# EAGLE board Receiver_SMD_MEGA_2560_v0.5 (EAGLE 6.4)
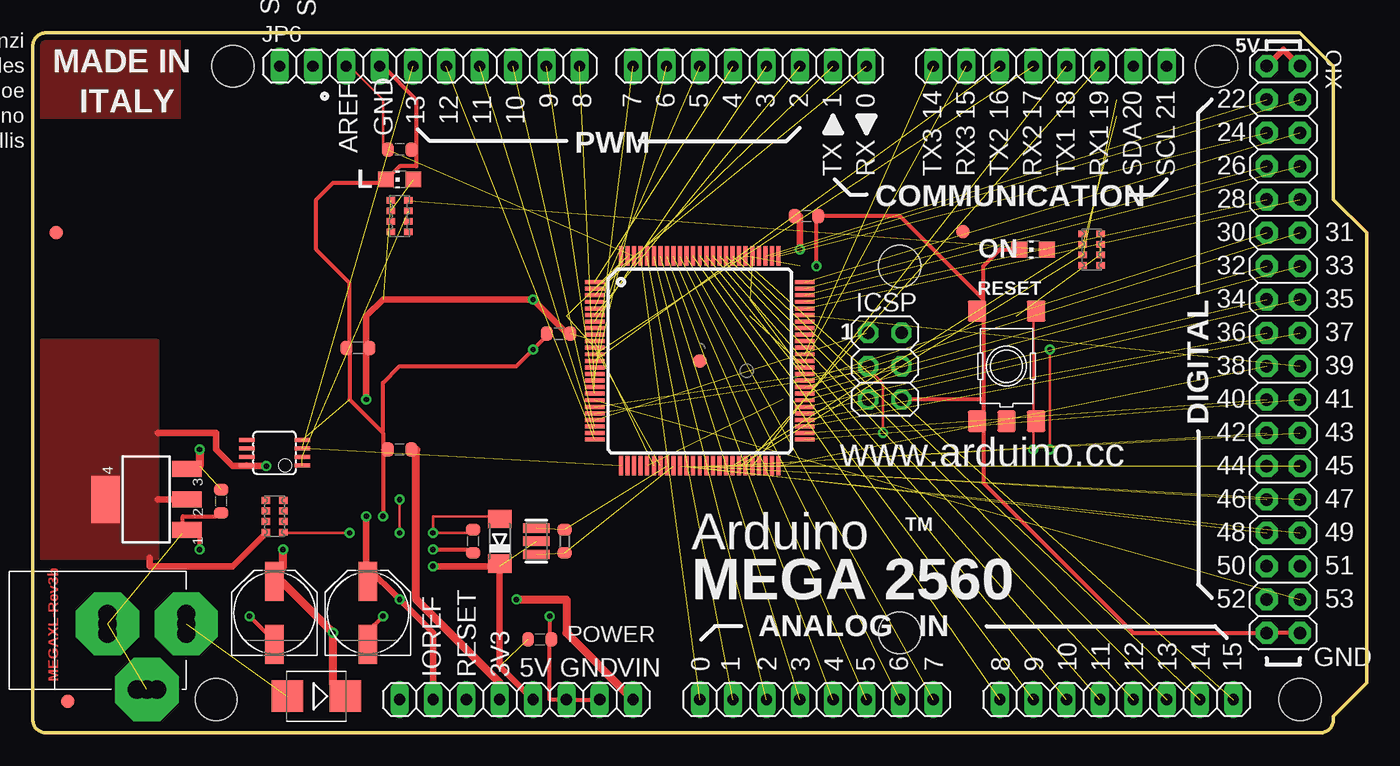
[diagram p0: board, top side]
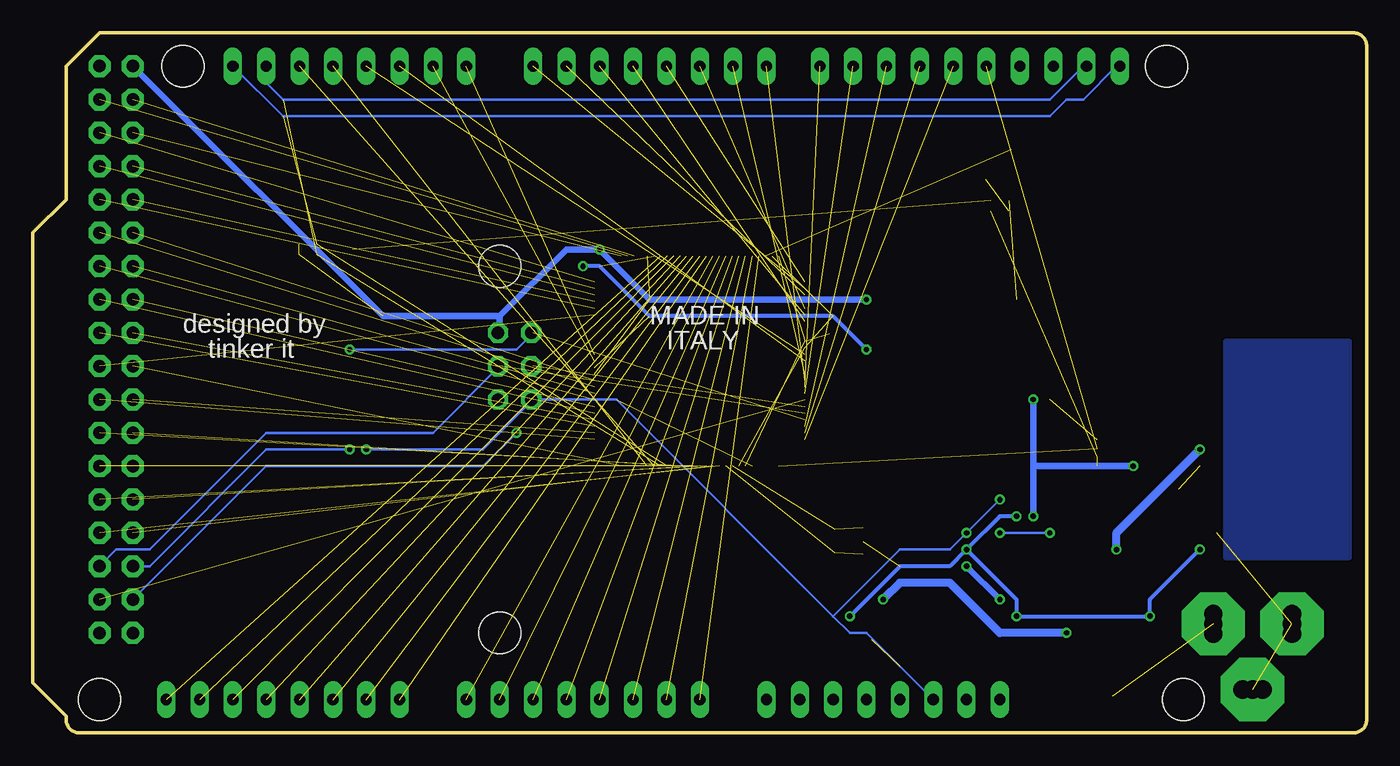
[diagram p1: board, bottom side, seen from below]

Size 101.6 x 53.34 mm. Coordinates in mm from the lower left corner, seen from the top.
Outline: 96.52,53.34 99.06,50.8 99.06,40.64 101.6,38.1 101.6,3.81 99.06,1.27 99.06,1 arc-90 98.06,0 1,0 arc-90 0,1 0,52.34 arc-90 1,53.34 96.52,53.34
Copper layers (1*16): Top 0.0356mm / dielectric 1.5011mm / Bottom 0.0356mm
Design rules "LaenPCBOrder": minimum track width 6mil, minimum drill 13mil, track to track 6mil, track to pad 6mil, pad to pad 6mil, via to via 12mil, smd to smd 6mil, copper to edge 15mil, drill to drill 6mil, minimum pad ring 7mil, minimum via ring 7mil, stop-mask expansion 4mil, vias tented up to drill 0mil, thermal gap 10mil
Net classes: 0 default: width 0.203 mm, drill 0.406 mm, clearance 0.203 mm; 1 power: width 0.61 mm, drill 0.406 mm, clearance 0.203 mm; 2 gnd: width 0.305 mm, drill 0.406 mm, clearance 0.203 mm; 3 power usb: width 0.508 mm, drill 0.406 mm, clearance 0.203 mm
Holes 3.2 mm at 96.52,2.54 15.24,50.8 90.17,50.8 13.97,2.54 66.04,35.56 66.04,7.62

## Footprints (pad centres in the part's own frame; a part is rotated, then mirrored left to right if it is on the bottom)
1X08 = drill 0.85 pad 1.422 long: 1 -8.89,0; 2 -6.35,0; 3 -3.81,0; 4 -1.27,0; 5 1.27,0; 6 3.81,0; 7 6.35,0; 8 8.89,0
C0603-ROUND = smd 0.898 x 1.1: 1 -0.889,0; 2 0.889,0
SMB = smd 2.4 x 2.4: A 2.2,0; C -2.2,0
MINIMELF = smd 1.4 x 1.8: A 1.7,0; C -1.7,0
FIDUCIA-MOUNT = smd 1.016 x 1.016: P$1 0,0
SOT223 = smd 1.219 x 2.235: 1 -2.311,-3.099; 2 0,-3.099; 3 2.311,-3.099 | smd 3.6 x 2.2: 4 0,3.099
TQFP100 = smd 1.5 x 0.3: 1 -8,6; 2 -8,5.5; 3 -8,5; 4 -8,4.5; 5 -8,4; 6 -8,3.5; 7 -8,3; 8 -8,2.5; 9 -8,2; 10 -8,1.5; 11 -8,1; 12 -8,0.5; 13 -8,0; 14 -8,-0.5; 15 -8,-1; 16 -8,-1.5; 17 -8,-2; 18 -8,-2.5; 19 -8,-3; 20 -8,-3.5; 21 -8,-4; 22 -8,-4.5; 23 -8,-5; 24 -8,-5.5; 25 -8,-6; 51 8,-6; 52 8,-5.5; 53 8,-5; 54 8,-4.5; 55 8,-4; 56 8,-3.5; 57 8,-3; 58 8,-2.5; 59 8,-2; 60 8,-1.5; 61 8,-1; 62 8,-0.5; 63 8,0; 64 8,0.5; 65 8,1; 66 8,1.5; 67 8,2; 68 8,2.5; 69 8,3; 70 8,3.5; 71 8,4; 72 8,4.5; 73 8,5; 74 8,5.5; 75 8,6 | smd 0.3 x 1.5: 26 -6,-8; 27 -5.5,-8; 28 -5,-8; 29 -4.5,-8; 30 -4,-8; 31 -3.5,-8; 32 -3,-8; 33 -2.5,-8; 34 -2,-8; 35 -1.5,-8; 36 -1,-8; 37 -0.5,-8; 38 0,-8; 39 0.5,-8; 40 1,-8; 41 1.5,-8; 42 2,-8; 43 2.5,-8; 44 3,-8; 45 3.5,-8; 46 4,-8; 47 4.5,-8; 48 5,-8; 49 5.5,-8; 50 6,-8; 76 6,8; 77 5.5,8; 78 5,8; 79 4.5,8; 80 4,8; 81 3.5,8; 82 3,8; 83 2.5,8; 84 2,8; 85 1.5,8; 86 1,8; 87 0.5,8; 88 0,8; 89 -0.5,8; 90 -1,8; 91 -1.5,8; 92 -2,8; 93 -2.5,8; 94 -3,8; 95 -3.5,8; 96 -4,8; 97 -4.5,8; 98 -5,8; 99 -5.5,8; 100 -6,8
MSOP08 = smd 0.3 x 1.2: 1 -0.976,-2.113; 2 -0.326,-2.113; 3 0.324,-2.113; 4 0.974,-2.113; 5 0.974,2.112; 6 0.324,2.112; 7 -0.326,2.112; 8 -0.976,2.112
2X03 = drill 0.95 pad 1.55 octagon: 1 -2.54,-1.27; 2 -2.54,1.27; 3 0,-1.27; 4 0,1.27; 5 2.54,-1.27; 6 2.54,1.27
1X10 = drill 0.85 pad 1.422 long: 1 -11.43,0; 2 -8.89,0; 3 -6.35,0; 4 -3.81,0; 5 -1.27,0; 6 1.27,0; 7 3.81,0; 8 6.35,0; 9 8.89,0; 10 11.43,0
CHIP-LED0805 = smd 1.2 x 1.2: A 0,-1.05; C 0,1.05
PANASONIC_D = smd 3 x 1.4: + 2.4,0; - -2.4,0
R0603-ROUND = smd 0.898 x 1.1: 1 -0.889,0; 2 0.889,0
TS42 = smd 1.6 x 1.4: 1 -4.2,2.25; 2 4.2,2.25; 3 -4.2,-2.25; 4 4.2,-2.25; 5 -4.2,0
CAT16 = smd 0.5 x 0.65: 1 -1.2,-0.675; 2 -0.4,-0.675; 3 0.4,-0.675; 4 1.2,-0.675; 5 1.2,0.675; 6 0.4,0.675; 7 -0.4,0.675; 8 -1.2,0.675
CAY16 = smd 0.5 x 0.65: 1 -1.2,-0.675; 2 -0.4,-0.675; 3 0.4,-0.675; 4 1.2,-0.675; 5 1.2,0.675; 6 0.4,0.675; 7 -0.4,0.675; 8 -1.2,0.675
POWERSUPPLY_DC-21MM = drill 1.4 pad 4.826 octagon: 1 -5.08,-3.353; 2 -0.076,-6.35; 3 -0.076,-0.356 | drill 1.4: 4 -5.08,-4.115; 5 -5.08,-2.591; 6 -0.838,-0.356; 7 0.686,-0.356; 8 -0.838,-6.35; 9 0.686,-6.35
2X18 = drill 0.95 pad 1.676 octagon: 1 -21.59,-1.27; 2 -21.59,1.27; 3 -19.05,-1.27; 4 -19.05,1.27; 5 -16.51,-1.27; 6 -16.51,1.27; 7 -13.97,-1.27; 8 -13.97,1.27; 9 -11.43,-1.27; 10 -11.43,1.27; 11 -8.89,-1.27; 12 -8.89,1.27; 13 -6.35,-1.27; 14 -6.35,1.27; 15 -3.81,-1.27; 16 -3.81,1.27; 17 -1.27,-1.27; 18 -1.27,1.27; 19 1.27,-1.27; 20 1.27,1.27; 21 3.81,-1.27; 22 3.81,1.27; 23 6.35,-1.27; 24 6.35,1.27; 25 8.89,-1.27; 26 8.89,1.27; 27 11.43,-1.27; 28 11.43,1.27; 29 13.97,-1.27; 30 13.97,1.27; 31 16.51,-1.27; 32 16.51,1.27; 33 19.05,-1.27; 34 19.05,1.27; 35 21.59,-1.27; 36 21.59,1.27
RESONATOR = smd 0.7 x 2: 1 -1,0; 2 0,0; 3 1,0

## Placement (x,y rotation side)
ADCH  8x1F-H8.5  [1X08]  82.55,2.54 0 top
ADCL  8x1F-H8.5  [1X08]  59.69,2.54 0 top
C1  22p  [C0603-ROUND]  33.53,14.61 270 top
C2  100n  [C0603-ROUND]  14.35,17.65 270 top
C3  100n  [C0603-ROUND]  27.94,44.45 0 top
C4  100n  [C0603-ROUND]  38.61,7.11 0 top
C5  100n  [C0603-ROUND]  58.93,39.37 0 top
C6  100n  [C0603-ROUND]  40.05,30.42 180 top
C11  100n  [C0603-ROUND]  24.77,29.34 0 top
C13  1u  [C0603-ROUND]  27.94,21.59 0 top
COMMUNICATION  8x1F-H8.5  [1X08]  77.47,50.8 180 top
D1  M7  [SMB]  21.59,2.79 180 top
D3  CD1206-S01575  [MINIMELF]  35.56,14.61 90 top
FD1  FIDUCIALMOUNT  [FIDUCIA-MOUNT]  70.84,38.19 0 top
FD2  FIDUCIALMOUNT  [FIDUCIA-MOUNT]  2.67,2.41 0 top
FD3  FIDUCIALMOUNT  [FIDUCIA-MOUNT]  1.78,38.1 0 top
FD4  FIDUCIALMOUNT  [FIDUCIA-MOUNT]  50.8,28.35 0 top
IC1  NCP1117ST50T3G  [SOT223]  8.64,17.78 90 top
IC3  ATMEGA2560-16AU  [TQFP100]  50.8,28.35 0 top
IC7  LMV358IDGKR  [MSOP08]  18.41,21.34 90 top
ICSP  3x2M  [2X03]  64.9,27.94 270 top
JP6  10x1F-H8.5  [1X10]  30.23,50.8 0 top
L  YELLOW  [CHIP-LED0805]  27.94,42.16 90 top
ON  GREEN  [CHIP-LED0805]  76.2,36.83 90 top
PC1  47u  [PANASONIC_D]  18.41,9.14 90 top
PC2  47u  [PANASONIC_D]  25.53,9.14 90 top
POWER  8x1F-H8.5  [1X08]  36.83,2.54 0 top
PWML  8x1F-H8.5  [1X08]  54.61,50.8 180 top
R1  1M  [R0603-ROUND]  40.51,14.61 90 top
RESET  TS42031-160R-TR-7260  [TS42]  74.17,27.94 90 top
RN1  10K  [CAT16]  80.64,36.83 270 top
RN3  1k  [CAY16]  27.94,39.37 270 top
RN5  10K  [CAT16]  18.41,16.51 90 top
X1  POWERSUPPLY_DC21MMX  [POWERSUPPLY_DC-21MM]  5.33,8.38 90 top
XIO  18x2F-H8.5  [2X18]  95.25,29.21 270 top
Y1  CSTCE16M0V53-R0 16MHZ  [RESONATOR]  38.35,14.61 270 top

## Library data of the parts
ADCH ADCL C1-C6 C11 C13 COMMUNICATION FD1-FD4 IC3 ICSP JP6 POWER PWML R1 RESET X1 XIO Y1 = SmartPrj
D1 D3 = diode
IC1 IC7 = linear
L ON = led
PC1 PC2 = rcl
RN1 RN3 RN5 = resistor-dil

## Nets
5-GND: RESET.5
+3V3 [power]: C13.2 POWER.4
+5V [power usb]: C4.1 C5.1 C6.1 C11.2 D3.C IC1.2 IC1.4 IC3.10 IC3.31 IC3.61 IC3.80 IC3.100 IC7.8 ICSP.2 PC2.+ POWER.2 POWER.5 RN1.6 RN1.7 RN3.1 RN5.8 XIO.1 XIO.2
ADC0: ADCL.1 IC3.97
ADC1: ADCL.2 IC3.96
ADC2: ADCL.3 IC3.95
ADC3: ADCL.4 IC3.94
ADC4: ADCL.5 IC3.93
ADC5: ADCL.6 IC3.92
ADC6: ADCL.7 IC3.91
ADC7: ADCL.8 IC3.90
ADC8: ADCH.1 IC3.89
ADC9: ADCH.2 IC3.88
ADC10: ADCH.3 IC3.87
ADC11: ADCH.4 IC3.86
ADC12: ADCH.5 IC3.85
ADC13: ADCH.6 IC3.84
ADC14: ADCH.7 IC3.83
ADC15: ADCH.8 IC3.82
AREF: C3.1 IC3.98 JP6.3
GND [gnd]: C1.2 C2.2 C3.2 C4.2 C5.2 C6.2 C11.1 C13.1 IC1.1 IC3.11 IC3.32 IC3.62 IC3.81 IC3.99 IC7.4 ICSP.6 JP6.4 L.C ON.C PC1.- PC2.- POWER.6 POWER.7 RESET.1 RESET.2 X1.1 X1.3 XIO.35 XIO.36 Y1.2
L13: IC7.1 IC7.2 RN3.7
N$2: L.A RN3.2
N$3: ON.A RN3.8
PA0: IC3.78 XIO.3
PA1: IC3.77 XIO.4
PA2: IC3.76 XIO.5
PA3: IC3.75 XIO.6
PA4: IC3.74 XIO.7
PA5: IC3.73 XIO.8
PA6: IC3.72 XIO.9
PA7: IC3.71 XIO.10
PB0: IC3.19 XIO.34
PB1: IC3.20 ICSP.3 XIO.33
PB2: IC3.21 ICSP.4 XIO.32
PB3: IC3.22 ICSP.1 XIO.31
PB4: IC3.23 JP6.8
PB5: IC3.24 JP6.7
PB6: IC3.25 JP6.6
PB7: IC3.26 IC7.3 JP6.5
PC0: IC3.53 XIO.18
PC1: IC3.54 XIO.17
PC2: IC3.55 XIO.16
PC3: IC3.56 XIO.15
PC4: IC3.57 XIO.14
PC5: IC3.58 XIO.13
PC6: IC3.59 XIO.12
PC7: IC3.60 XIO.11
PD7: IC3.50 XIO.19
PE0: IC3.2 PWML.1
PE1: IC3.3 PWML.2
PE3: IC3.5 PWML.6
PE4: IC3.6 PWML.3
PE5: IC3.7 PWML.4
PG0: IC3.51 XIO.22
PG1: IC3.52 XIO.21
PG2: IC3.70 XIO.20
PG5: IC3.1 PWML.5
PH3: IC3.15 PWML.7
PH4: IC3.16 PWML.8
PH5: IC3.17 JP6.10
PH6: IC3.18 JP6.9
PL0: IC3.35 XIO.30
PL1: IC3.36 XIO.29
PL2: IC3.37 XIO.28
PL3: IC3.38 XIO.27
PL4: IC3.39 XIO.26
PL5: IC3.40 XIO.25
PL6: IC3.41 XIO.24
PL7: IC3.42 XIO.23
PWRIN [power]: D1.A X1.2
RESET: C1.1 D3.A IC3.30 ICSP.5 POWER.3 RESET.3 RESET.4 RN5.1
RXD1: COMMUNICATION.3 IC3.45
RXD2: COMMUNICATION.5 IC3.12
RXD3: COMMUNICATION.7 IC3.63
SCL: COMMUNICATION.1 IC3.43 JP6.1 RN1.2
SDA: COMMUNICATION.2 IC3.44 JP6.2 RN1.3
TXD1: COMMUNICATION.4 IC3.46
TXD2: COMMUNICATION.6 IC3.13
TXD3: COMMUNICATION.8 IC3.64
VIN [power]: C2.1 D1.C IC1.3 PC1.+ POWER.8
XTAL1: IC3.34 R1.1 Y1.3
XTAL2: IC3.33 R1.2 Y1.1

## Tracks (layer width: path | path; a pad name or v marks a point on that pad's centre or on a via)
+3V3
  Top 0.61: POWER.4 35.56,3.81 29.21,10.16 29.21,21.59 C13.2
+5V  (via drill 0.41)  (9 unrouted)
  Top 0.508: RN5.8 17.78,15.24 15.24,12.7 8.89,12.7 8.89,13.34 | 16.51,20.32 15.24,20.32 13.97,21.59 13.97,22.86 10.16,22.86 9.53,22.86 | 16.51,20.32 IC7.8 16.51,20.32 | IC1.2 11.43,17.78 10.16,17.78 9.53,17.78 | 35.56,12.7 35.56,5.08 POWER.5 | 35.56,12.7 D3.C 35.56,12.7 | v25.4,25.4 25.4,29.21 | 25.4,12.7 v25.4,16.51 | 25.4,29.21 C11.2 25.4,29.21 | 25.4,12.7 PC2.+ 25.4,12.7 | 25.4,29.21 25.4,31.75 26.67,33.02 v38.1,33.02 40.64,30.48 C6.1 | POWER.2 30.48,7.62 v27.94,10.16 25.4,12.7 | v30.48,12.7 35.56,12.7 | v17.78,20.32 16.51,20.32 | XIO.1 95.25,52.07 XIO.2 | v58.42,36.83 58.42,39.37 C5.1
  Bottom 0.508: v25.4,16.51 25.4,20.32 | 25.4,20.32 v25.4,25.4 | v27.94,10.16 v30.48,12.7 | 25.4,20.32 v17.78,20.32 | 66.04,31.75 60.96,36.83 v58.42,36.83 54.61,33.02 v38.1,33.02 | 66.04,31.75 66.04,30.48 ICSP.2 | XIO.1 74.93,31.75 66.04,31.75
  pour Top (isolate 0.406, no thermals): 9.53,13.34 9.53,29.84 0.64,29.84 0.64,13.34
  pour Bottom: 1.27,13.34 1.27,29.84 10.79,29.84 10.79,13.34
ADC0  (1 unrouted)
ADC1  (1 unrouted)
ADC2  (1 unrouted)
ADC3  (1 unrouted)
ADC4  (1 unrouted)
ADC5  (1 unrouted)
ADC6  (1 unrouted)
ADC7  (1 unrouted)
ADC8  (1 unrouted)
ADC9  (1 unrouted)
ADC10  (1 unrouted)
ADC11  (1 unrouted)
ADC12  (1 unrouted)
ADC13  (1 unrouted)
ADC14  (1 unrouted)
ADC15  (1 unrouted)
AREF  (1 unrouted)
  Top 0.203: C3.1 26.67,44.45 26.67,48.26 24.13,50.8 JP6.3
GND  (via drill 0.41)  (9 unrouted)
  Top 0.305: XIO.36 XIO.35 83.82,7.62 72.39,19.05 72.39,24.13 | C5.2 66.04,39.37 72.39,33.02 | C5.2 59.69,39.37 | 72.39,31.75 72.39,33.02 | 59.69,39.37 C5.2 | 72.39,31.75 RESET.2 72.39,31.75 | 72.39,33.02 72.39,35.56 73.66,36.83 74.93,36.83 ON.C | 72.39,31.75 72.39,25.4 | 72.39,25.4 72.39,24.13 | 72.39,24.13 RESET.1 72.39,24.13 | 72.39,25.4 ICSP.6 | ICSP.6 66.04,25.4 ICSP.6 | C2.2 13.97,16.51 11.43,16.51 11.43,15.24 IC1.1 12.7,15.24 v12.7,13.97 | v16.51,8.89 17.78,7.62 PC1.- | 29.21,44.45 29.21,48.26 26.67,50.8 JP6.4 | 29.21,44.45 C3.2 29.21,44.45 | 26.67,41.91 27.94,43.18 29.21,43.18 29.21,44.45 | 26.67,41.91 L.C 26.67,41.91 | 39.37,7.62 39.37,2.54 POWER.6 POWER.7 | 39.37,7.62 C4.2 39.37,7.62 | 26.67,22.86 26.67,21.59 | 26.67,22.86 24.13,25.4 24.13,29.21 | 26.67,21.59 C13.1 26.67,21.59 | 24.13,29.21 C11.1 24.13,29.21 | v30.48,13.97 33.02,13.97 C1.2 | 26.67,21.59 v26.67,16.51 | 26.67,22.86 26.67,26.67 27.94,27.94 36.83,27.94 v38.1,29.21 39.37,30.48 C6.2 | v26.67,8.89 25.4,7.62 PC2.- | v39.37,8.89 39.37,7.62 | 26.67,41.91 22.86,41.91 21.59,40.64 21.59,36.83 24.13,34.29 24.13,29.21 | v59.69,35.56 59.69,39.37 | 59.69,39.37 C5.2
  Bottom 0.305: v12.7,13.97 16.51,10.16 v16.51,8.89 v26.67,8.89 26.67,10.16 v30.48,13.97 | v30.48,13.97 27.94,16.51 v26.67,16.51 | v39.37,8.89 35.56,12.7 31.75,12.7 v30.48,13.97 | v59.69,35.56 58.42,35.56 54.61,31.75 40.64,31.75 v38.1,29.21
L13  (2 unrouted)
N$1
  pour Top: 0.64,52.7 10.79,52.7 11.18,52.7 11.18,46.86 0.64,46.86
N$2  (1 unrouted)
N$3  (1 unrouted)
PA0  (1 unrouted)
PA1  (1 unrouted)
PA2  (1 unrouted)
PA3  (1 unrouted)
PA4  (1 unrouted)
PA5  (1 unrouted)
PA6  (1 unrouted)
PA7  (1 unrouted)
PB0  (1 unrouted)
PB1  (via drill 0.41)  (1 unrouted)
  Top 0.203: v64.77,22.86 64.77,26.67 63.5,27.94 ICSP.3
  Bottom 0.203: v64.77,22.86 67.31,20.32 83.82,20.32 XIO.33
PB2  (1 unrouted)
  Bottom 0.203: XIO.32 95.25,13.97 92.71,13.97 83.82,22.86 71.12,22.86 66.04,27.94 ICSP.4
PB3  (via drill 0.41)  (1 unrouted)
  Top 0.203: v77.47,21.59 v77.47,29.21
  Bottom 0.203: v77.47,29.21 64.77,29.21 63.5,30.48 ICSP.1 | v77.47,21.59 83.82,21.59 92.71,12.7 XIO.31
PB4  (1 unrouted)
PB5  (1 unrouted)
PB6  (1 unrouted)
PB7  (2 unrouted)
PC0  (1 unrouted)
PC1  (1 unrouted)
PC2  (1 unrouted)
PC3  (1 unrouted)
PC4  (1 unrouted)
PC5  (1 unrouted)
PC6  (1 unrouted)
PC7  (1 unrouted)
PD7  (1 unrouted)
PE0  (1 unrouted)
PE1  (1 unrouted)
PE3  (1 unrouted)
PE4  (1 unrouted)
PE5  (1 unrouted)
PG0  (1 unrouted)
PG1  (1 unrouted)
PG2  (1 unrouted)
PG5  (1 unrouted)
PH3  (1 unrouted)
PH4  (1 unrouted)
PH5  (1 unrouted)
PH6  (1 unrouted)
PL0  (1 unrouted)
PL1  (1 unrouted)
PL2  (1 unrouted)
PL3  (1 unrouted)
PL4  (1 unrouted)
PL5  (1 unrouted)
PL6  (1 unrouted)
PL7  (1 unrouted)
PWRIN  (1 unrouted)
RESET  (via drill 0.41)  (1 unrouted)
  Top 0.203: 76.2,24.13 76.2,31.75 RESET.4 | 76.2,24.13 RESET.3 76.2,24.13 | 76.2,24.13 v76.2,21.59 | v24.13,15.24 19.05,15.24 RN5.1 | v27.94,17.78 v27.94,15.24 | C1.1 33.02,15.24 v30.48,15.24 30.48,16.51 35.56,16.51 D3.A
  Bottom 0.203: 63.5,25.4 67.31,21.59 v76.2,21.59 | 63.5,25.4 ICSP.5 63.5,25.4 | v27.94,15.24 v24.13,15.24 | v27.94,17.78 v30.48,15.24 31.75,13.97 35.56,13.97 40.64,8.89 | POWER.3 38.1,7.62 39.37,7.62 40.64,8.89 | 63.5,25.4 57.15,25.4 40.64,8.89
RXD1  (1 unrouted)
RXD2  (1 unrouted)
RXD3  (1 unrouted)
SCL  (2 unrouted)
  Bottom 0.203: COMMUNICATION.1 82.55,46.99 24.13,46.99 22.86,48.26 21.59,48.26 19.05,50.8 JP6.1
SDA  (2 unrouted)
  Bottom 0.203: COMMUNICATION.2 83.82,49.53 82.55,48.26 24.13,48.26 21.59,50.8 JP6.2
TXD1  (1 unrouted)
TXD2  (1 unrouted)
TXD3  (1 unrouted)
VIN  (via drill 0.41)  (1 unrouted)
  Top 0.61: v12.7,21.59 12.7,20.32 IC1.3 | v19.05,13.97 19.05,12.7 PC1.+ 19.05,11.43 v22.86,7.62 22.86,3.81 D1.C | POWER.8 40.64,7.62 40.64,10.16 v36.83,10.16
  Bottom 0.61: v12.7,21.59 19.05,15.24 v19.05,13.97 | v36.83,10.16 35.56,11.43 31.75,11.43 27.94,7.62 v22.86,7.62
XTAL1  (2 unrouted)
XTAL2  (2 unrouted)

## Text on the board
Top: MEGAXL-Rev3b
tPlace: 9 | 8 | 7 | 6 | 5 | 4 | 3 | 2 | 1 | 0 | 22 | 14 | 15 | 16 | 17 | 18 | 19 | 20 | 21 | 13 | 12 | 11 | 10 | 24 | 26 | 28 | 30 | 31 | 32 | 33 | 34 | 35 | 36 | 37 | 38 | 39 | 40 | 41 | 42 | 43 | www.arduino.cc | 44 | 45 | 46 | 47 | TM | 48 | 49 | 50 | 51 | 52 | 53 | 0 | 1 | 2 | 3 | 4 | 5 | 6 | 7 | 8 | 9 | 10 | 11 | 12 | 13 | 14 | 15
tNames: SCL | SDA | M.Banzi | 5V | D.Cuartielles | T.Igoe | MADE IN | G.Martino | ITALY | D.Mellis | GND | AREF | PWM | TX | RX | TX3 | RX3 | TX2 | RX2 | TX1 | RX1 | SDA | SCL | 1 | DIGITAL | Arduino | MEGA 2560 | ANALOG IN | GND | IOREF | RESET | 3V3 | 5V | GND | VIN
bNames: MADE IN | designed by | ITALY | tinker it
ReferenceLC: L | ON | TX | RX | PC1 | PC2